# EAGLE board CT_schematic (EAGLE 7.6.0)

Size 100 x 80 mm. Coordinates in mm from the lower left corner, seen from the top.
Outline: 0,0 100,0 100,80 0,80 0,0
Copper layers (1*16): Top 0.035mm / dielectric 1.5mm / Bottom 0.035mm
Design rules "default": minimum track width 10mil, minimum drill 24mil, track to track 8mil, track to pad 8mil, pad to pad 8mil, via to via 8mil, smd to smd 8mil, copper to edge 40mil, drill to drill 8mil, minimum pad ring 10mil, minimum via ring 8mil, stop-mask expansion 4mil, vias tented up to drill 0mil, thermal gap 10mil

## Footprints (pad centres in the part's own frame; a part is rotated, then mirrored left to right if it is on the bottom)
C0603 = smd 0.8 x 0.8: 1 -0.762,0; 2 0.762,0
C0402 = smd 0.5 x 0.5: 1 -0.508,0; 2 0.508,0
C0805 = smd 1.2 x 1.3: 1 -1.016,0; 2 1.016,0
C1210 = smd 1.2 x 2.5: 1 -1.524,0; 2 1.524,0
EXV-9H = smd 3.505 x 1.676: 1 -2.857,0; 2 2.857,0
L0603 = smd 0.8 x 0.8: 1 -0.762,0; 2 0.762,0
DR1040 = smd 1.6 x 3.2: 1 -4.458,0; 2 4.458,0
PJ-037B_PACKAGE = drill 3.7 square: 1 12,0 | drill 3.2 square: 2 6,0
R0603 = smd 0.8 x 0.8: 1 -0.762,0; 2 0.762,0
UFQFPN28 = smd 0.559 x 0.305: 1 -2.07,1.5; 7 -2.07,-1.5; 15 2.07,-1.5; 21 2.07,1.5 | smd 0.813 x 0.305: 2 -1.943,1; 3 -1.943,0.5; 4 -1.943,0; 5 -1.943,-0.5; 6 -1.943,-1; 16 1.943,-1; 17 1.943,-0.5; 18 1.943,0; 19 1.943,0.5; 20 1.943,1 | smd 0.305 x 0.559: 8 -1.5,-2.07; 14 1.5,-2.07; 22 1.5,2.07; 28 -1.5,2.07 | smd 0.305 x 0.813: 9 -1,-1.943; 10 -0.5,-1.943; 11 0,-1.943; 12 0.5,-1.943; 13 1,-1.943; 23 1,1.943; 24 0.5,1.943; 25 0,1.943; 26 -0.5,1.943; 27 -1,1.943
SOIC-8 = smd 1.6 x 0.6: 1 -2.7,1.905 | smd 1.55 x 0.6: 2 -2.7,0.635; 3 -2.7,-0.635; 4 -2.7,-1.905; 5 2.7,-1.905; 6 2.7,-0.635; 7 2.7,0.635; 8 2.7,1.905
QFN-16 = smd 0.813 x 0.305: 1 -1.448,0.75; 2 -1.448,0.25; 3 -1.448,-0.25; 4 -1.448,-0.75; 9 1.448,-0.75; 10 1.448,-0.25; 11 1.448,0.25; 12 1.448,0.75 | smd 0.305 x 0.813: 5 -0.75,-1.448; 6 -0.25,-1.448; 7 0.25,-1.448; 8 0.75,-1.448; 13 0.75,1.448; 14 0.25,1.448; 15 -0.25,1.448; 16 -0.75,1.448 | smd 1.803 x 1.803: 17 0,0
QFN-28 = smd 0.813 x 0.305: 1 -2.451,1.5; 2 -2.451,1; 3 -2.451,0.5; 4 -2.451,0; 5 -2.451,-0.5; 6 -2.451,-1; 7 -2.451,-1.5; 15 2.451,-1.5; 16 2.451,-1; 17 2.451,-0.5; 18 2.451,0; 19 2.451,0.5; 20 2.451,1; 21 2.451,1.5 | smd 0.305 x 0.813: 8 -1.5,-2.451; 9 -1,-2.451; 10 -0.5,-2.451; 11 0,-2.451; 12 0.5,-2.451; 13 1,-2.451; 14 1.5,-2.451; 22 1.5,2.451; 23 1,2.451; 24 0.5,2.451; 25 0,2.451; 26 -0.5,2.451; 27 -1,2.451; 28 -1.5,2.451 | smd 3.607 x 3.607: 29 0,0
SJ-43515TS-SMT-TR = smd 2.2 x 3: 1 0.6,-7.4; 4 3.4,-7.4 | smd 3 x 3: 2 12.8,-7.4; 5 17,-3 | smd 2 x 3: 3 5.3,0; 6 2.5,0 | drill 1.8: P$7 4.5,-3.69; P$8 11.54,-3.69
ABLS-25.000MHZ-B2F-T = smd 5.6 x 2.8: 1 -3.81,0; 2 5.69,0
ASFL1 = smd 1.7 x 1.5: 1 -1.27,-1.1; 2 1.27,-1.1; 3 1.27,1.1; 4 -1.27,1.1
TSOT-23-5 = smd 1.3 x 0.62: 1 -1.31,0.95; 2 -1.31,0; 3 -1.31,-0.95; 4 1.31,-0.95; 5 1.31,0.95
WSON-8 = smd 0.3 x 0.6: 1 -0.75,0; 2 0.05,0; 3 0.85,0; 4 1.65,0; 5 1.65,3.8; 6 0.85,3.8; 7 0.05,3.8; 8 -0.75,3.8 | smd 3 x 2.6: PAD 0.45,1.9
SON-6 = smd 0.55 x 0.3: 1 -0.355,0.5 | smd 0.52 x 0.3: 2 -0.37,0; 3 -0.37,-0.5; 4 0.37,-0.5; 5 0.37,0; 6 0.37,0.5
SW_4-1437565-2 = smd 1.4 x 2.1: 1 -2.23,4.55; 2 -2.23,-4.55; 3 2.23,4.55; 4 2.23,-4.55
LGM67K-G1J2-24-Z = smd 0.8 x 1.4: A -2,0; C 0,0
NC7SZ125M5X = smd 1.3 x 0.7: 1 -1.3,0.95; 2 -1.3,0; 3 -1.3,-0.95; 4 1.3,-0.95; 5 1.3,0.95

## Placement (x,y rotation side)
C1  1e-07  [C0603]  -36.83,66.04 0 top  (outside the outline)
C2  1e-07  [C0603]  -40.64,66.04 0 top  (outside the outline)
C3  4.7e-06  [C0603]  -29.21,66.04 0 top  (outside the outline)
C4  4.7e-06  [C0603]  -33.02,66.04 0 top  (outside the outline)
C5  1e-08  [C0603]  -44.45,66.04 0 top  (outside the outline)
C6  1e-08  [C0603]  -48.26,66.04 0 top  (outside the outline)
C7  1e-06  [C0603]  -52.07,66.04 0 top  (outside the outline)
C8  1e-11  [C0402]  -34.29,71.12 0 top  (outside the outline)
C9  1e-11  [C0402]  -38.1,71.12 0 top  (outside the outline)
C10  1e-08  [C0402]  -41.91,71.12 0 top  (outside the outline)
C11  4.7e-06  [C0805]  -63.5,48.26 0 top  (outside the outline)
C12  1e-07  [C0402]  -45.72,71.12 0 top  (outside the outline)
C13  1e-07  [C0402]  -49.53,71.12 0 top  (outside the outline)
C14  2.2e-05  [C1210]  -24.13,49.53 0 top  (outside the outline)
C15  2.2e-05  [C1210]  -30.48,49.53 0 top  (outside the outline)
C16  1e-09  [C0402]  -53.34,71.12 0 top  (outside the outline)
C17  1e-09  [C0402]  -57.15,71.12 0 top  (outside the outline)
C18  1e-07  [C0402]  -60.96,71.12 0 top  (outside the outline)
C19  1e-07  [C0402]  -64.77,71.12 0 top  (outside the outline)
C20  1e-07  [C0402]  -68.58,71.12 0 top  (outside the outline)
C21  1e-07  [C0402]  -72.39,71.12 0 top  (outside the outline)
C22  1e-07  [C0402]  -15.24,76.2 0 top  (outside the outline)
C23  1e-05  [C0805]  -68.58,48.26 0 top  (outside the outline)
C24  1e-05  [C0805]  -15.24,55.88 0 top  (outside the outline)
C25  1e-05  [C0805]  -20.32,55.88 0 top  (outside the outline)
C26  1e-05  [C0805]  -25.4,55.88 0 top  (outside the outline)
C27  1e-05  [C0805]  -30.48,55.88 0 top  (outside the outline)
C28  1e-08  [C0402]  -19.05,76.2 0 top  (outside the outline)
C29  1e-05  [C0805]  -35.56,55.88 0 top  (outside the outline)
C30  1e-05  [C0805]  -40.64,55.88 0 top  (outside the outline)
C31  1e-06  [C0603]  -55.88,66.04 0 top  (outside the outline)
C32  1e-05  [C1210]  -36.83,49.53 0 top  (outside the outline)
C33  1e-07  [C0402]  -22.86,76.2 0 top  (outside the outline)
C34  0.0001  [EXV-9H]  -17.78,41.91 0 top  (outside the outline)
C35  0.0001  [EXV-9H]  -29.21,41.91 0 top  (outside the outline)
C36  1e-08  [C0402]  -26.67,76.2 0 top  (outside the outline)
F1  240.0  [L0603]  -59.69,66.04 0 top  (outside the outline)
I1  7e-06  [DR1040]  -54.61,20.32 0 top  (outside the outline)
J1  PJ-037B  [PJ-037B_PACKAGE]  -27.94,21.59 0 top  (outside the outline)
R1  10000.0  [R0603]  -30.48,60.96 0 top  (outside the outline)
R2  1000.0  [R0603]  -63.5,66.04 0 top  (outside the outline)
R3  910.0  [R0603]  -67.31,66.04 0 top  (outside the outline)
R4  4700.0  [R0603]  -71.12,66.04 0 top  (outside the outline)
R5  2200.0  [R0603]  -15.24,71.12 0 top  (outside the outline)
R6  2200.0  [R0603]  -19.05,71.12 0 top  (outside the outline)
R7  10000.0  [R0603]  -35.56,60.96 0 top  (outside the outline)
R8  10000.0  [R0603]  -40.64,60.96 0 top  (outside the outline)
R9  10000.0  [R0603]  -45.72,60.96 0 top  (outside the outline)
R10  10000.0  [R0603]  -50.8,60.96 0 top  (outside the outline)
R11  10000.0  [R0603]  -55.88,60.96 0 top  (outside the outline)
R12  47000.0  [R0603]  -60.96,60.96 0 top  (outside the outline)
R13  47000.0  [R0603]  -66.04,60.96 0 top  (outside the outline)
R14  47000.0  [R0603]  -71.12,60.96 0 top  (outside the outline)
R15  680.0  [R0603]  -22.86,71.12 0 top  (outside the outline)
R16  490000.0  [R0603]  -63.5,54.61 0 top  (outside the outline)
R17  1000000.0  [R0603]  -53.34,54.61 0 top  (outside the outline)
R18  100000.0  [R0603]  -68.58,54.61 0 top  (outside the outline)
R19  153694.38  [R0603]  -58.42,54.61 0 top  (outside the outline)
R20  100000.0  [R0603]  -15.24,60.96 0 top  (outside the outline)
R21  10000.0  [R0603]  -15.24,66.04 0 top  (outside the outline)
R22  10000.0  [R0603]  -20.32,66.04 0 top  (outside the outline)
R23  82000.0  [R0603]  -25.4,66.04 0 top  (outside the outline)
R24  300000.0  [R0603]  -20.32,60.96 0 top  (outside the outline)
R25  120000.0  [R0603]  -25.4,60.96 0 top  (outside the outline)
U1  stm32f048g6u7  [UFQFPN28]  -50.8,49.53 0 top  (outside the outline)
U2  AT25080B-SSHL-T  [SOIC-8]  -24.13,33.02 0 top  (outside the outline)
U3  MMA8451QT  [QFN-16]  -27.94,71.12 0 top  (outside the outline)
U4  WM8731CLSEFL  [QFN-28]  -16.51,49.53 0 top  (outside the outline)
U5  SJ-43515TS-SMT-TR  [SJ-43515TS-SMT-TR]  -39.37,10.16 0 top  (outside the outline)
U6  SJ-43515TS-SMT-TR  [SJ-43515TS-SMT-TR]  -67.31,10.16 0 top  (outside the outline)
U7  ABLS-25.000MHZ-B2F-T  [ABLS-25.000MHZ-B2F-T]  -48.26,41.91 0 top  (outside the outline)
U8  ASFL1-12.288MHZ-EC-T  [ASFL1]  -64.77,33.02 0 top  (outside the outline)
U9  ltc3406es5  [TSOT-23-5]  -45.72,54.61 0 top  (outside the outline)
U10  LP2951ACSDX/NOPB  [WSON-8]  -44.45,31.75 0 top  (outside the outline)
U11  TPS3895ADRYR  [SON-6]  -29.21,74.93 0 top  (outside the outline)
U12  4-1437565-2  [SW_4-1437565-2]  -44.45,21.59 0 top  (outside the outline)
U13  Q65110A2395  [LGM67K-G1J2-24-Z]  -59.69,41.91 0 top  (outside the outline)
U14  nc7sz125m5x  [NC7SZ125M5X]  -57.15,48.26 0 top  (outside the outline)

## Library data of the parts
C1-C36 F1 I1 J1 R1-R25 U1-U14 = circuit_tree

## Nets
CLK_CRYSTAL_U1_2: C8.1 U1.2 U7.1
CLK_CRYSTAL_U1_3: C9.1 U1.3 U7.2
CLK_U4_1: U4.1 U8.3
GND: C1.2 C2.2 C3.2 C4.2 C5.2 C6.2 C7.2 C8.2 C9.2 C10.2 C11.2 C12.2 C13.2 C17.2 C18.2 C19.2 C20.2 C21.2 C22.2 C23.2 C24.2 C25.2 C26.2 C27.2 C28.2 C29.2 C30.1 C30.2 C31.2 C32.2 C33.2 C34.2 C35.2 C36.2 J1.2 R2.2 R7.2 R11.2 R12.2 R13.2 R14.2 R16.2 R20.2 R23.2 R25.2 U1.16 U2.4 U3.5 U3.10 U3.12 U3.17 U4.4 U4.15 U4.19 U4.25 U4.26 U4.29 U5.1 U6.1 U8.2 U9.2 U10.3 U10.4 U10.PAD U11.2 U13.C U14.1 U14.3
NET_U1_1: R5.1 U1.1 U3.4
NET_U1_4: R4.1 U1.4 U14.4
NET_U1_5: C5.1 C6.1 C7.1 F1.1 U1.5
NET_U1_15: R7.1 U1.15
NET_U1_20: R6.1 U1.20 U3.6
NET_U1_27: R3.1 U1.27 U13.A
NET_U1_28: R1.1 U1.28 U12.3 U12.4
NET_U2_3: R8.1 U2.3
NET_U2_7: R10.1 U2.7
NET_U3_2: C13.1 U3.2
NET_U3_7: R11.1 U3.7
NET_U4_9: U4.9
NET_U4_20: C22.1 C27.1 U4.20
NET_U5_2: C15.1 R13.1 U5.2
NET_U5_5: C14.1 R12.1 U5.5
NET_U5_13: C14.2
NET_U5_14: C15.2
NET_U6_5: C16.1 C17.1 R14.1 R15.1 U6.5
NET_U6_21: R15.2
NET_U6_22: C16.2
NET_U9_1: U9.1
NET_U9_3: I1.1 U9.3
NET_U9_5: R16.1 R17.1 U9.5
NET_U9_ATNET_3: I1.2 R17.2
NET_U10_5: R18.1 U10.5
NET_U10_7: R19.2 R20.1 U10.7
NET_U11_1: R22.1 R23.1 U11.1
NET_U11_3: R24.2 R25.1 U11.3
NET_U11_4: R21.1 U11.4 U14.2
NET_U12_1: R2.1 U12.1 U12.2
PROC_I2S1_CK: U1.24 U4.7
PROC_I2S1_SD: U1.26 U4.8
PROC_I2S1_WS: U1.23 U4.9 U4.11
PROC_SPI1_MISO: U1.12 U2.2
PROC_SPI1_MOSI: U1.13 U2.5
PROC_SPI1_NSS: R9.1 U1.10 U2.1
PROC_SPI1_SCK: U1.11 U2.6
VCC_S1_5V3: C29.1 C31.1 C34.1 C35.1 J1.1 U9.4 U10.8
VCC_TIER1_1V8: C1.1 C2.1 C3.1 C4.1 C10.1 C12.1 C18.1 C19.1 C20.1 C21.1 C23.1 C24.1 C25.1 C26.1 C30.2 C33.1 C36.1 F1.2 I1.2 R1.2 R3.2 R4.2 R5.2 R6.2 R8.2 R9.2 R10.2 R17.2 R21.2 R22.2 R24.1 U1.17 U1.18 U2.8 U3.1 U4.3 U4.5 U4.12 U4.18 U11.6 U14.5
VCC_TIER1_3V3: C11.1 C28.1 C32.1 R18.2 R19.1 U3.14 U8.4 U10.1

## Tracks (layer width: path | path; a pad name or v marks a point on that pad's centre or on a via)
CLK_CRYSTAL_U1_2  (2 unrouted)
CLK_CRYSTAL_U1_3  (2 unrouted)
CLK_U4_1  (1 unrouted)
GND  (67 unrouted)
NET_U1_1  (2 unrouted)
NET_U1_4  (2 unrouted)
NET_U1_5  (4 unrouted)
NET_U1_15  (1 unrouted)
NET_U1_20  (2 unrouted)
NET_U1_27  (2 unrouted)
NET_U1_28  (3 unrouted)
NET_U2_3  (1 unrouted)
NET_U2_7  (1 unrouted)
NET_U3_2  (1 unrouted)
NET_U3_7  (1 unrouted)
NET_U4_20  (2 unrouted)
NET_U5_2  (2 unrouted)
NET_U5_5  (2 unrouted)
NET_U6_5  (4 unrouted)
NET_U9_3  (1 unrouted)
NET_U9_5  (2 unrouted)
NET_U9_ATNET_3  (1 unrouted)
NET_U10_5  (1 unrouted)
NET_U10_7  (2 unrouted)
NET_U11_1  (2 unrouted)
NET_U11_3  (2 unrouted)
NET_U11_4  (2 unrouted)
NET_U12_1  (2 unrouted)
PROC_I2S1_CK  (1 unrouted)
PROC_I2S1_SD  (1 unrouted)
PROC_I2S1_WS  (2 unrouted)
PROC_SPI1_MISO  (1 unrouted)
PROC_SPI1_MOSI  (1 unrouted)
PROC_SPI1_NSS  (2 unrouted)
PROC_SPI1_SCK  (1 unrouted)
VCC_S1_5V3  (6 unrouted)
VCC_TIER1_1V8  (40 unrouted)
VCC_TIER1_3V3  (7 unrouted)